# EAGLE board Irrigação Automatica (EAGLE 9.7.0)

Size 153.88 x 505.41 mm. Coordinates in mm from the lower left corner, seen from the top.
Outline: 0,0 153.88,0 153.88,505.41 0,505.41 0,0
Copper layers (1*16): Top 0.035mm / dielectric 1.5mm / Bottom 0.035mm
Design rules "default": minimum track width 6mil, minimum drill 0.35mm, track to track 6mil, track to pad 6mil, pad to pad 6mil, via to via 6mil, smd to smd 6mil, copper to edge 40mil, drill to drill 6mil, minimum pad ring 10mil, minimum via ring 8mil, stop-mask expansion 4mil, vias tented up to drill 0mil, thermal gap 10mil

## Footprints (pad centres in the part's own frame; a part is rotated, then mirrored left to right if it is on the bottom)
1X08 = drill 1.016 long: 1 -8.89,0; 2 -6.35,0; 3 -3.81,0; 4 -1.27,0; 5 1.27,0; 6 3.81,0; 7 6.35,0; 8 8.89,0
DG01D = drill 1.118 pad 3.15 octagon: + 2.54,0; - -2.54,0
TO220V = drill 1.016 long: 1 -2.54,-2.54; 2 0,-2.54; 3 2.54,-2.54
RESAD1016W63L850D250B = drill 0.83 pad 1.43: 1 -5.08,0; 2 5.08,0
HA-06-SM065 = drill 1 pad 1.676: 1 -2.54,-2.54; 2 0,2.54; 3 2.54,-2.54
ARDUINO-UNO-R3-SHIELD = drill 1.016 pad 1.88: 3.3V 24.13,-2.54; 5V 24.13,0; A0 24.13,12.7; A1 24.13,15.24; A2 24.13,17.78; A3 24.13,20.32; A4 24.13,22.86; A5 24.13,25.4; AREF -24.13,-13.97; D2 -24.13,20.32; D3 -24.13,17.78; D4 -24.13,15.24; D5 -24.13,12.7; D6 -24.13,10.16; D7 -24.13,7.62; D8 -24.13,3.81; D9 -24.13,1.27; D10 -24.13,-1.27; D11 -24.13,-3.81; D12 -24.13,-6.35; D13 -24.13,-8.89; GND@0 24.13,2.54; GND@1 24.13,5.08; GND@2 -24.13,-11.43; IOREF 24.13,-7.62; NC 24.13,-10.16; RES 24.13,-5.08; RX -24.13,25.4; SCL -24.13,-19.05; SDA -24.13,-16.51; TX -24.13,22.86; VIN 24.13,7.62
JHD-162A = drill 1.016 long: 1 -19.05,0; 2 -16.51,0; 3 -13.97,0; 4 -11.43,0; 5 -8.89,0; 6 -6.35,0; 7 -3.81,0; 8 -1.27,0; 9 1.27,0; 10 3.81,0; 11 6.35,0; 12 8.89,0; 13 11.43,0; 14 13.97,0; 15 16.51,0; 16 19.05,0

## Placement (x,y rotation side)
KEYPAD1  KEYPAD-4X4  [1X08]  92.31,6.35 0 top
M1  MOTOR_DG01D  [DG01D]  7.62,57.16 90 top
Q1  TIP120_TO220-V  [TO220V]  65.81,336.56 0 top
R1  1k  [RESAD1016W63L850D250B]  126.77,321.32 90 top
R2  1k  [RESAD1016W63L850D250B]  124.23,321.32 90 top
R3  1k  [RESAD1016W63L850D250B]  121.69,321.32 90 top
R4  1k  [RESAD1016W63L850D250B]  119.15,321.32 90 top
R6  1k  [RESAD1016W63L850D250B]  58.19,334.02 0 top
RPOT1  250k  [HA-06-SM065]  146.83,124.86 180 top
U2  ARDUINO-UNO-R3-SHIELD  [ARDUINO-UNO-R3-SHIELD]  102.95,475.57 90 top
U3  LCD-16X2JHD-162A  [JHD-162A]  78.94,136.57 0 top

## Library data of the parts
KEYPAD1 M1 Q1 R1-R4 R6 RPOT1 U2 U3 = Tinkercad

## Nets
M1_-: M1.- Q1.2
Q1_B: Q1.1 R6.2
U2_5V: M1.+ RPOT1.3 U2.5V U3.2
U2_A1: RPOT1.2 U2.A1
U2_D2: U2.D2 U3.4
U2_D3: U2.D3 U3.6
U2_D4: U2.D4 U3.11
U2_D5: KEYPAD1.8 R1.2 U2.D5 U3.12
U2_D6: KEYPAD1.7 R2.2 U2.D6 U3.13
U2_D7: KEYPAD1.6 R3.2 U2.D7 U3.14
U2_D8: KEYPAD1.5 R4.2 U2.D8
U2_D9: KEYPAD1.4 U2.D9
U2_D10: KEYPAD1.3 U2.D10
U2_D11: KEYPAD1.2 U2.D11
U2_D12: KEYPAD1.1 U2.D12
U2_D13: R6.1 U2.D13
U2_GND: Q1.3 R1.1 R2.1 R3.1 R4.1 RPOT1.1 U2.GND@0 U2.GND@1 U2.GND@2 U3.1 U3.3 U3.5

## Tracks (layer width: path | path; a pad name or v marks a point on that pad's centre or on a via)
M1_-  (1 unrouted)
Q1_B  (1 unrouted)
U2_5V  (3 unrouted)
U2_A1  (1 unrouted)
U2_D2  (1 unrouted)
U2_D3  (1 unrouted)
U2_D4  (1 unrouted)
U2_D5  (3 unrouted)
U2_D6  (3 unrouted)
U2_D7  (3 unrouted)
U2_D8  (2 unrouted)
U2_D9  (1 unrouted)
U2_D10  (1 unrouted)
U2_D11  (1 unrouted)
U2_D12  (1 unrouted)
U2_D13  (1 unrouted)
U2_GND  (11 unrouted)